# Altium PCB AQCA-Light-Module-A0.PcbDoc
Units mm, origin at the board's own origin, x right, y up, seen from the top; angles counter-clockwise.
Board outline 100 x 100 mm, 2 copper layers (Top Layer, Bottom Layer); 21 components, 26 nets, 74 pads, 175 vias.
Unrouted connection lines stored in the file: 1.
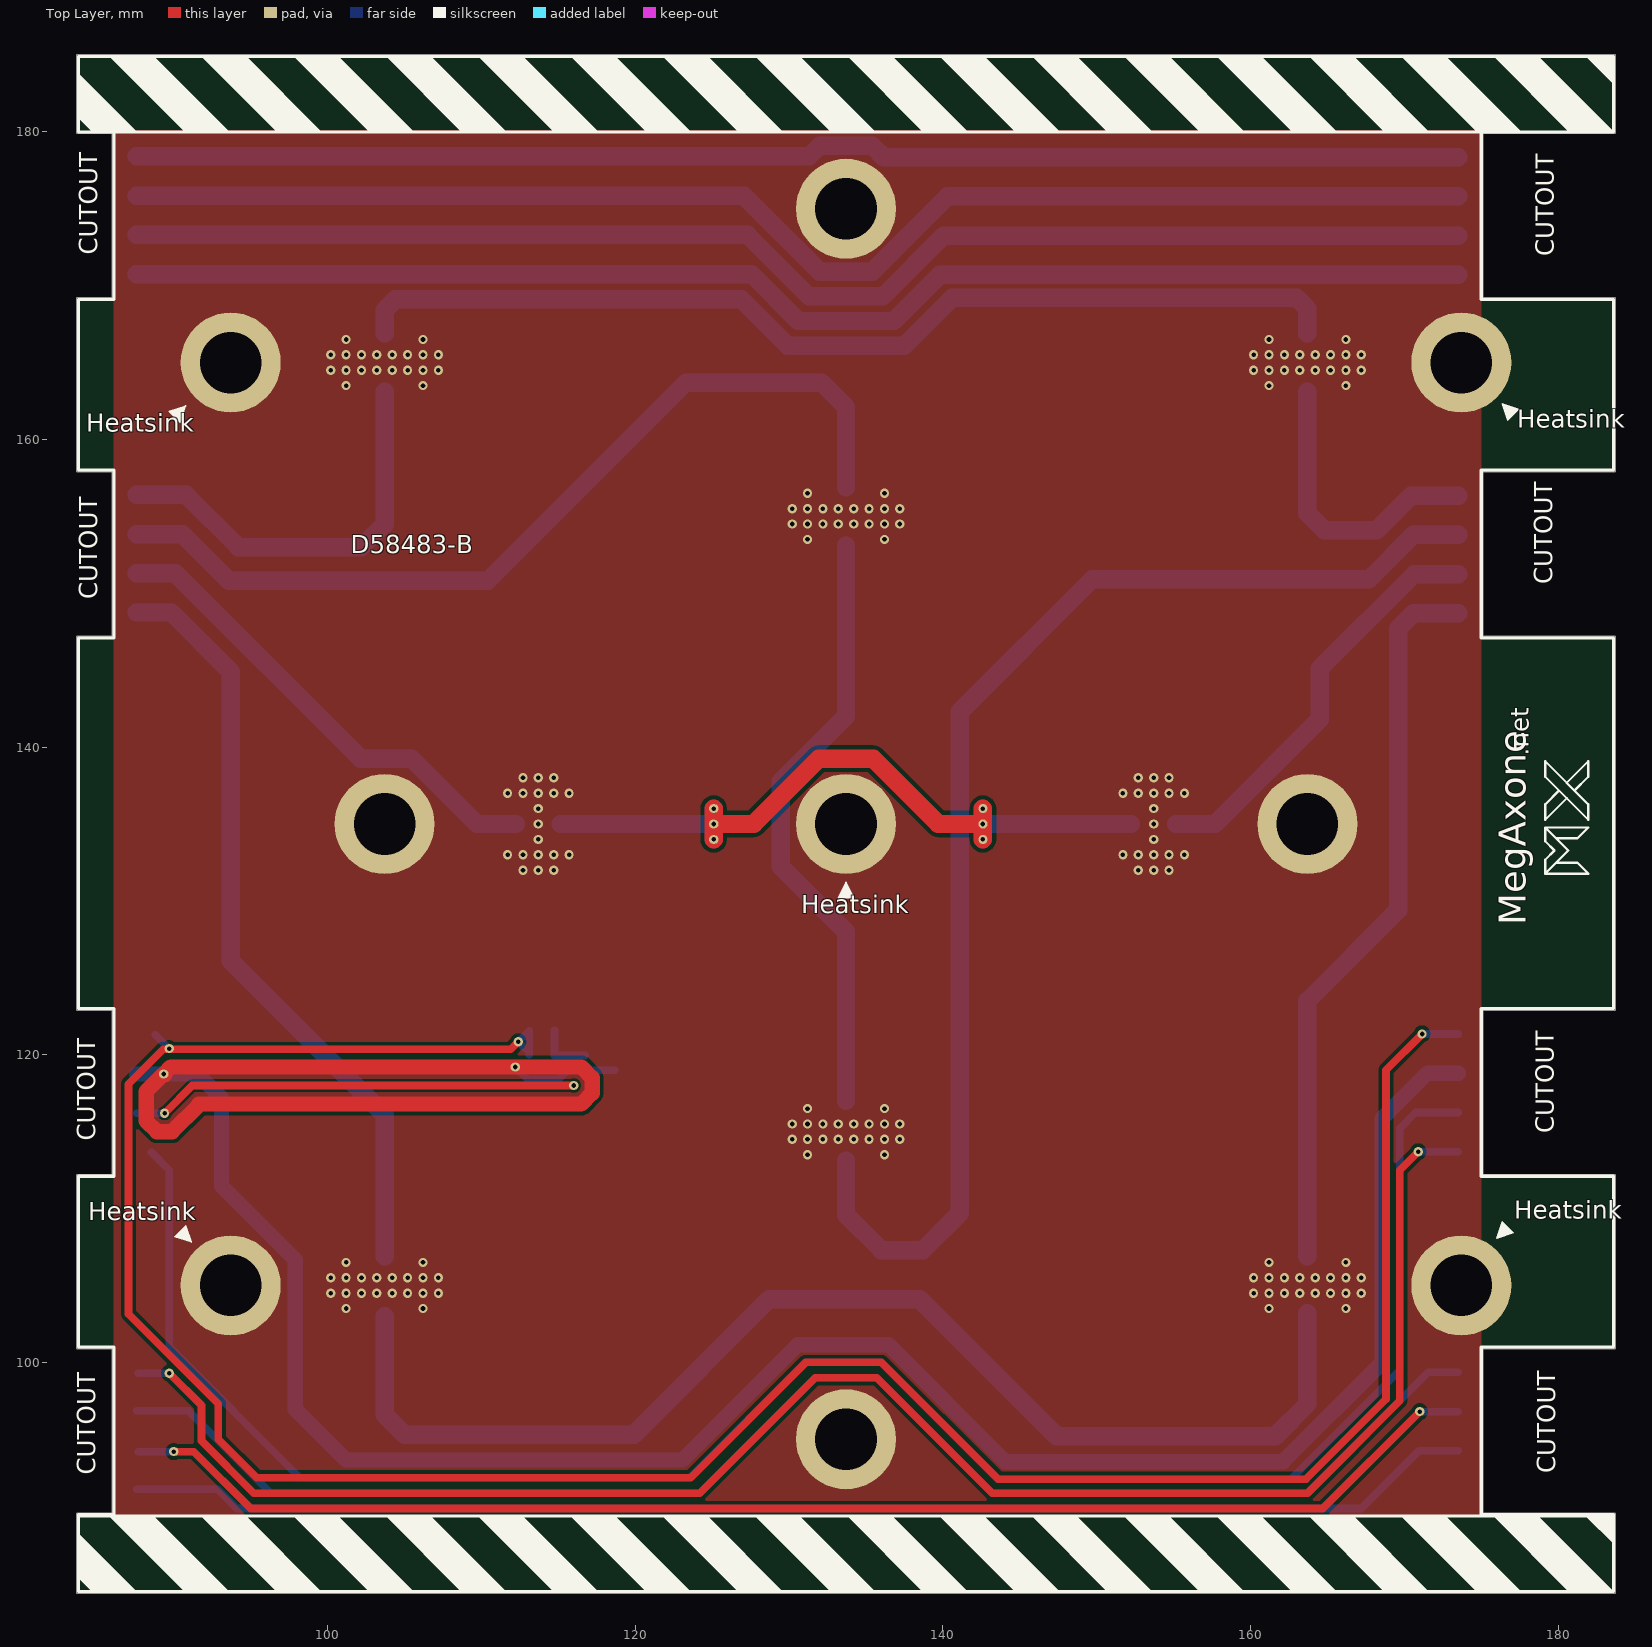
[diagram p0: Top Layer view]
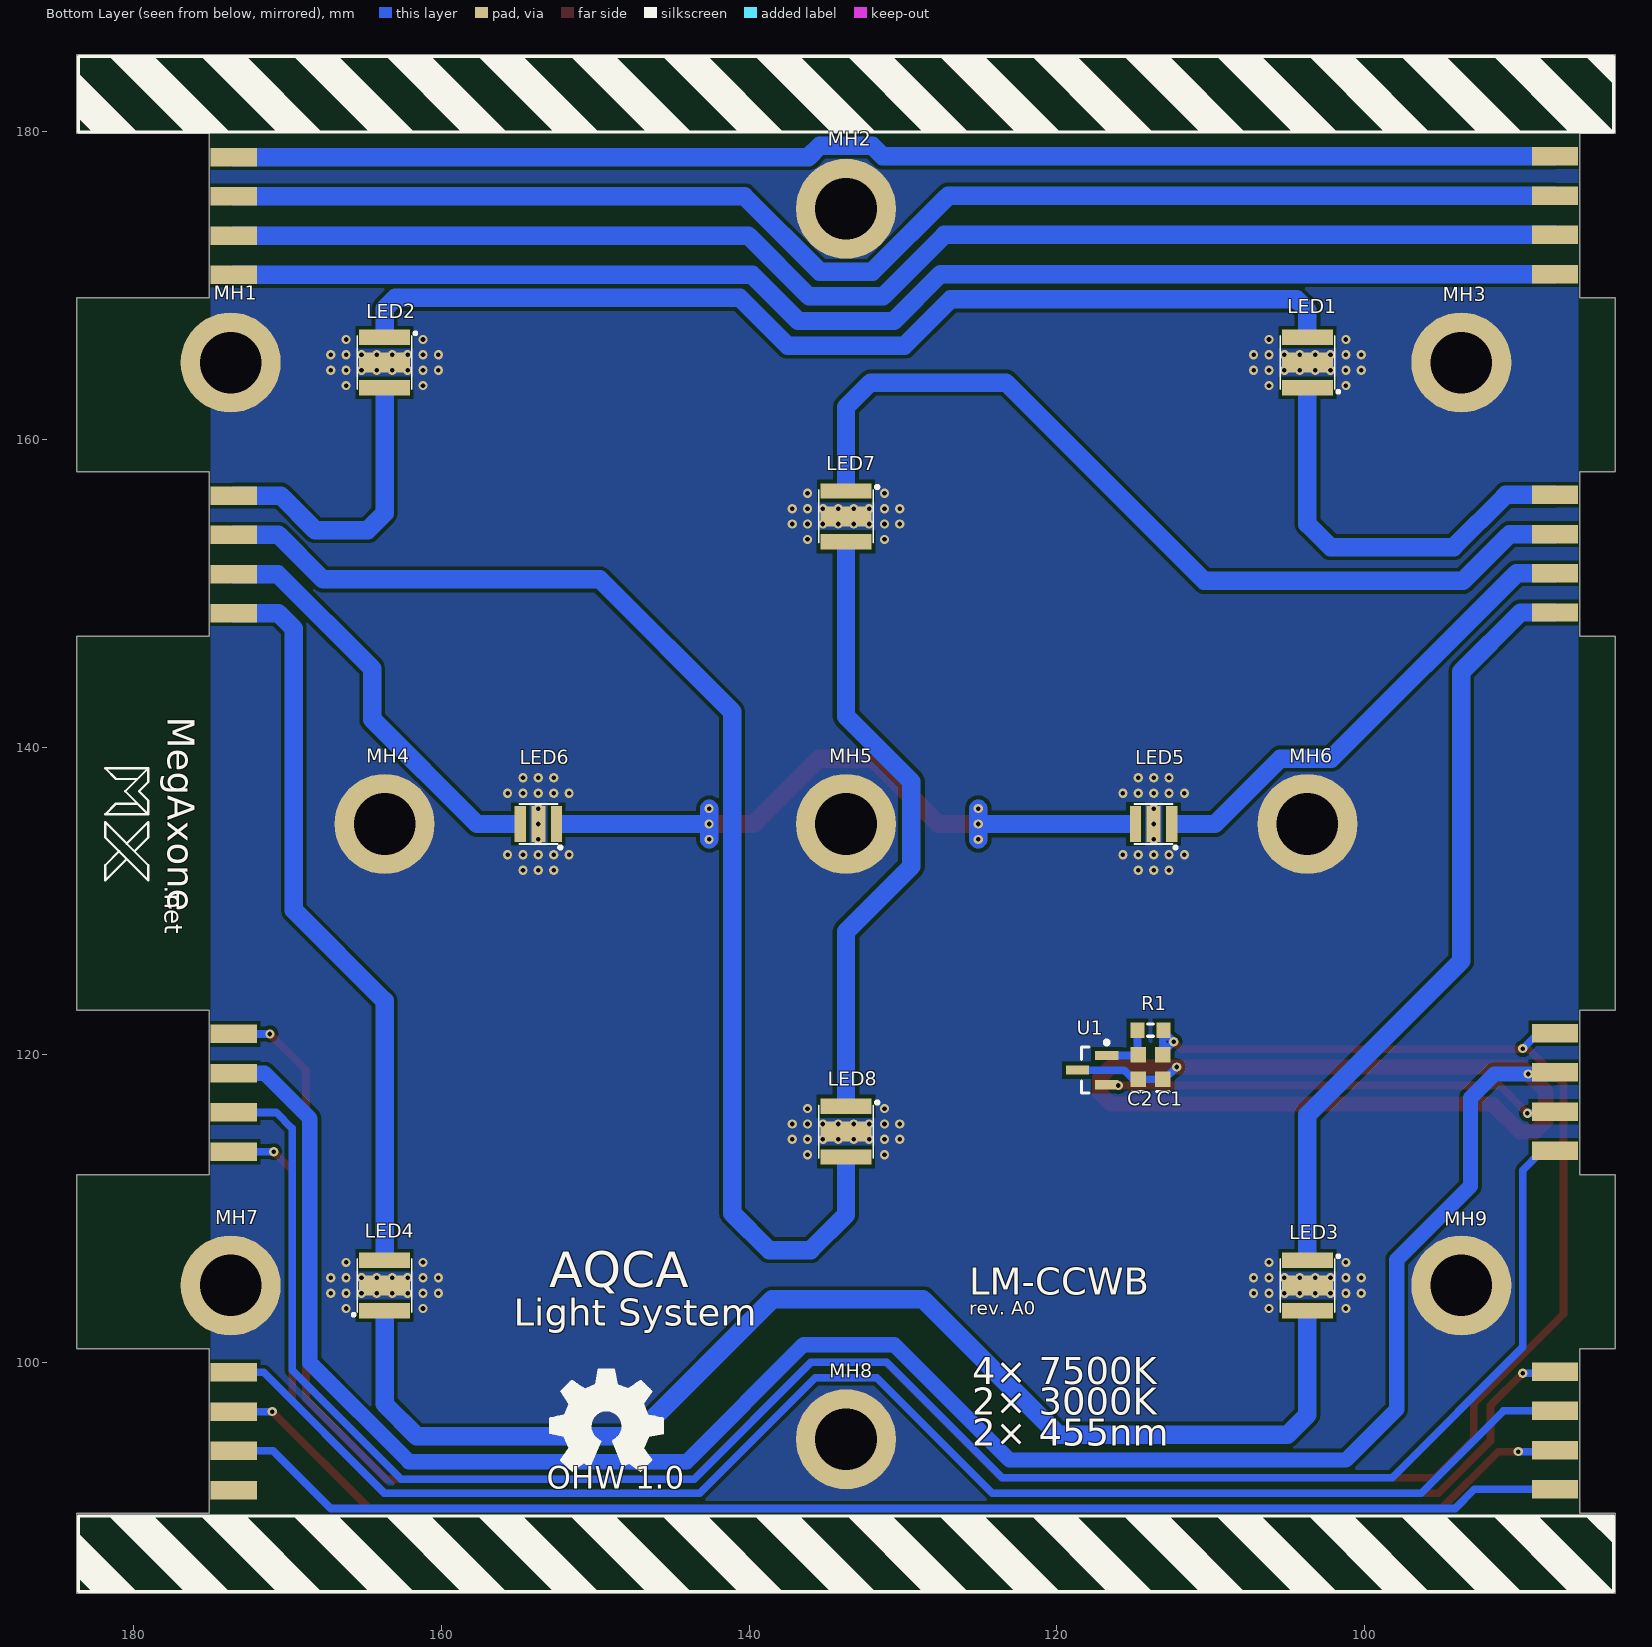
[diagram p1: Bottom Layer view, seen from below]

## Layer stack, top to bottom
Top Layer: signal copper 0.0356
Dielectric: dielectric 0.32, FR-4, Dk 4.8
Bottom Layer: signal copper 0.0356

## Board outline
83.7,85 83.7,90.2 86,90.2 86,100.9 83.7,100.9 83.7,112.2 86,112.2 86,122.9 83.7,122.9 83.7,147.2 86,147.2 86,157.9 83.7,157.9 83.7,169.2 86,169.2 86,179.9 83.7,179.9 83.7,185 183.7,185 183.7,179.9 175.1,179.9 175.1,169.2 183.7,169.2 183.7,157.9 175.1,157.9 175.1,147.2 183.7,147.2 183.7,122.9 175.1,122.9 175.1,112.2 183.7,112.2 183.7,100.9 175.1,100.9 175.1,90.2 183.7,90.2 183.7,85

## Design rules (kind name [scope] priority, off if disabled: settings)
Clearance Clearance_Heatsink [InNet('Heatsink')] p1: gap=0.25
Clearance [All] p2: gap=0.152
HoleSize [All] p1: absolutevalues=TRUE maxlimit=6.35 minlimit=0.3 maxpercent=80.000 minpercent=20.000
MinimumSolderMaskSliver [All] p1: minsoldermaskwidth=0.152
PlaneConnect [All] p1: planeconnectstyle=Direct reliefexpansion=0.508 reliefentries=4 reliefconductorwidth=0.254 reliefairgap=0.254
PolygonConnect [All] p1: connectstyle=Direct reliefconductorwidth=0.254 reliefentries=4 polygonreliefangle="90 Angle"
RoutingVias [All] p1: holewidth=0.3 width=0.6 viastyle="Through Hole" minholewidth=0.3 minwidth=0.6 maxholewidth=6.35 maxwidth=6.5
SilkToSilkClearance [All] p1: silktosilkclearance=0.152
SilkscreenOverComponentPads [All] p1: minsilkscreentomaskgap=0.254
SolderMaskExpansion [All] p1: expansion=0.05
Width [All] p1: maxlimit=12.7 minlimit=0.152 preferedwidth=0.254
23 further rules are at their usual default settings.

## Components (designator, comment, footprint, x,y, rotation, side; value= is the part's Value field where it differs from the comment)
C1 "1µF" CAPC1608N 113.1,119.2 r90 bottom
C2 "100nF" CAPC1608N 114.7,119.2 r90 bottom
LED1 "7500K" "LED XP-E" 103.7,165 r90 bottom
LED2 "7500K" "LED XP-E" 163.7,165 r270 bottom
LED3 "7500K" "LED XP-E" 103.7,105 r270 bottom
LED4 "7500K" "LED XP-E" 163.7,105 r90 bottom
LED5 "3000K" "LED XB-D" 113.7,135 r0 bottom
LED6 "3000K" "LED XB-D" 153.7,135 r0 bottom
LED7 "458nm" "LED XT-E" 133.7,155 r270 bottom
LED8 "458nm" "LED XT-E" 133.7,115 r270 bottom
MH1 "Mounting Hole" "Mount Hole 4-6.5" 173.7,165 r180 bottom
MH2 "Mounting Hole" "Mount Hole 4-6.5" 133.7,175 r180 bottom
MH3 "Mounting Hole" "Mount Hole 4-6.5" 93.7,165 r180 bottom
MH4 "Mounting Hole" "Mount Hole 4-6.5" 163.7,135 r180 bottom
MH5 "Mounting Hole" "Mount Hole 4-6.5" 133.7,135 r180 bottom
MH6 "Mounting Hole" "Mount Hole 4-6.5" 103.7,135 r180 bottom
MH7 "Mounting Hole" "Mount Hole 4-6.5" 173.7,105 r180 bottom
MH8 "Mounting Hole" "Mount Hole 4-6.5" 133.7,95 r180 bottom
MH9 "Mounting Hole" "Mount Hole 4-6.5" 93.7,105 r180 bottom
R1 "150" RESC1608N 113.9,121.6 r0 bottom
U1 "MCP9700" SOT23-3N 117.7,119 r0 bottom

## Footprints (in the part's own frame and the unit in brackets; to place one, negate y for a bottom-side part, rotate by r counter-clockwise, add the part's x,y. Pads: shape width x height; smd on the part's side, far side on the other; paste and mask are expansions set on the pad)
CAPC1608N [mm] "Chip Capacitor, Body 1.6x0.8mm, IPC Medium Density"
  rect 1x1 smd: 1(-0.8,0) 2(0.8,0)
  silkscreen extent -1.6,-0.4 -1.6,0.4, body extent -0.87,-0.48 0.87,0.48, height 0.85
"LED XB-D" [mm] "Cree LED XB-D Family 2.45×2.45mm body"
  rect 0.72x2.34 smd: A(-1.175,0) K(1.175,0)
  rect 0.92x2.34 smd: ""(0,0)
  silkscreen extent -1.5,-1.3 1.25,1.6, body extent -1.25,-1.3 1.25,1.3, height 1.85
"LED XP-E" [mm] "Cree Xlamp LED XP-E family 3.45×3.45mm body"
  rect 1x3.3 smd: A(-1.65,0) K(1.65,0)
  rect 1.3x3.3 smd: ""(0,0)
  silkscreen extent -1.96,-2.06 1.73,1.78, body extent -1.73,-1.78 1.73,1.78, height 2.3
"LED XT-E" [mm] "Cree LED XT-E family 3.45×3.45mm body"
  rect 1x3.3 smd: A(-1.65,0) K(1.65,0)
  rect 1.3x3.3 smd: ""(0,0)
  silkscreen extent -1.97,-1.78 1.72,2.1, body extent -1.73,-1.78 1.72,1.78, height 2.71
"Mount Hole 4-6.5" [mm] "Mounting Hole 4mm hole 6.5mm ring"
  round 6.5 hole 4: 1(0,0)
RESC1608N [mm] "Chip Resistor, Body 1.6x0.8mm, IPC Medium Density"
  rect 0.9x1 smd: 1(-0.85,0) 2(0.85,0)
  silkscreen extent -0.2,-0.4 0.2,0.4, body extent -0.85,-0.48 0.85,0.48, height 0.6
SOT23-3N [mm] "SOT23, 3-Leads, Body 2.9x1.3mm, Pitch 0.95mm, Lead Span 2.5mm, IPC Medium Density"
  rect 1.5x0.6 smd: 1(-0.95,-0.95) 2(-0.95,0.95) 3(0.95,0)
  silkscreen extent -1.07,-1.92 0.7,1.5, body extent -0.7,-1.5 0.7,1.5, height 1.1

## Part data
C1 C2: library part Capacitor
LED1 LED2 LED3 LED4 LED5 LED6 LED7 LED8: library part LED
R1: library part Resistor

## Free pads (board coordinates)
  rect 3x1.2 smd far side: 1(87.6,91.75) 1(87.6,113.75) 1(87.6,148.75) 1(87.6,170.75) 1(173.5,99.35) 1(173.5,121.35) 1(173.5,156.35) 1(173.5,178.35) 2(87.6,94.3) 2(87.6,116.3) 2(87.6,151.3) 2(87.6,173.3) 2(173.5,96.8) 2(173.5,118.8) 2(173.5,153.8) 2(173.5,175.8) 3(87.6,96.85) 3(87.6,118.85) 3(87.6,153.85) 3(87.6,175.85) 3(173.5,94.25) 3(173.5,116.25) 3(173.5,151.25) 3(173.5,173.25) 4(87.6,99.4) 4(87.6,121.4) 4(87.6,156.4) 4(87.6,178.4) 4(173.5,91.7) 4(173.5,113.7) 4(173.5,148.7) 4(173.5,170.7)

## Via types
v1: diameter 0.6, hole 0.3, Top Layer to Bottom Layer, tented both sides, 121 vias
v2: diameter 0.6, hole 0.3, Top Layer to Bottom Layer, 52 vias
v3: diameter 0.6, hole 0.3, Top Layer to Bottom Layer, tented top, 2 vias

## Nets (pads, with @x,y where several pads share a name; then routed paths per layer and width w, separated by ;. In a path a pad name is that pad's centre, name@x,y a point inside that pad or via, vN(x,y) a via of type N, cw(c..) or ccw(c..) an arc to the next point about the centre after c; other vN are vias at no path point)
GND: C1.1 C2.1 pad.2@173.5,118.8 pad.3@87.6,118.85 U1.3 | length 201.6
  Top Layer w1: v1(89.35,118.75) 89.8,119.2 v1(112.2,119.2) 116.497,119.2 117.2,118.497 117.2,117.503 116.497,116.8 91.626,116.8 91.626,116.729 89.897,115 88.903,115 88.2,115.703 88.2,117.6 89.3,118.7 v1@89.4,118.7
  Bottom Layer w0.5: v1(112.2,119.2) 113,118.4 C1.1 C2.1 115.019,118.4 115.619,119 U1.3
  Bottom Layer w1: pad.3@87.6,118.75 v1(89.35,118.75) 91.55,118.75 93.1,117.2 93.1,111.469 97.9,106.669 97.9,96.95 101.2,93.65 123.074,93.65 130.574,101.15 136.449,101.15 144.049,93.55 162.124,93.55 168.55,99.976 168.55,115.85 171.5,118.8 pad.2@173.5,118.8
Heatsink: LED1. LED2. LED3. LED4. LED5. LED6. LED7. LED8. MH1.1 MH2.1 MH3.1 MH4.1 MH5.1 MH6.1 MH7.1 MH8.1 MH9.1
  other v1: 101.2,103.5 106.2,103.5 161.2,103.5 166.2,103.5 100.2,104.5 101.2,104.5 106.2,104.5 107.2,104.5 160.2,104.5 161.2,104.5 166.2,104.5 167.2,104.5 100.2,105.5 101.2,105.5 106.2,105.5 107.2,105.5 160.2,105.5 161.2,105.5 166.2,105.5 167.2,105.5 101.2,106.5 106.2,106.5 161.2,106.5 166.2,106.5 131.2,113.5 136.2,113.5 130.2,114.5 131.2,114.5 136.2,114.5 137.2,114.5 130.2,115.5 131.2,115.5 136.2,115.5 137.2,115.5 131.2,116.5 136.2,116.5 112.7,132 113.7,132 114.7,132 152.7,132 153.7,132 154.7,132 111.7,133 112.7,133 113.7,133 114.7,133 115.7,133 151.7,133 152.7,133 153.7,133 154.7,133 155.7,133 111.7,137 112.7,137 113.7,137 114.7,137 115.7,137 151.7,137 152.7,137 153.7,137 154.7,137 155.7,137 112.7,138 113.7,138 114.7,138 152.7,138 153.7,138 154.7,138 131.2,153.5 136.2,153.5 130.2,154.5 131.2,154.5 136.2,154.5 137.2,154.5 130.2,155.5 131.2,155.5 136.2,155.5 137.2,155.5 131.2,156.5 136.2,156.5 101.2,163.5 106.2,163.5 161.2,163.5 166.2,163.5 100.2,164.5 101.2,164.5 106.2,164.5 107.2,164.5 160.2,164.5 161.2,164.5 166.2,164.5 167.2,164.5 100.2,165.5 101.2,165.5 106.2,165.5 107.2,165.5 160.2,165.5 161.2,165.5 166.2,165.5 167.2,165.5 101.2,166.5 106.2,166.5 161.2,166.5 166.2,166.5
  other v2: 102.2,104.5 103.2,104.5 104.2,104.5 105.2,104.5 162.2,104.5 163.2,104.5 164.2,104.5 165.2,104.5 102.2,105.5 103.2,105.5 104.2,105.5 105.2,105.5 162.2,105.5 163.2,105.5 164.2,105.5 165.2,105.5 132.2,114.5 133.2,114.5 134.2,114.5 135.2,114.5 132.2,115.5 133.2,115.5 134.2,115.5 135.2,115.5 153.7,134 153.7,135 113.7,136 153.7,136 132.2,154.5 133.2,154.5 134.2,154.5 135.2,154.5 132.2,155.5 133.2,155.5 134.2,155.5 135.2,155.5 102.2,164.5 103.2,164.5 104.2,164.5 105.2,164.5 162.2,164.5 163.2,164.5 164.2,164.5 165.2,164.5 102.2,165.5 103.2,165.5 104.2,165.5 105.2,165.5 162.2,165.5 163.2,165.5 164.2,165.5 165.2,165.5
  other v3: 113.7,134 113.7,135
NetC2_2: C2.2 R1.2 U1.1 | length 3.6
  Bottom Layer w0.5: R1.2 114.75,119.95 U1.1
NetLED1_A: LED1.A pad.4@87.6,156.4 | length 26.7
  Bottom Layer w1: 90.8,156.4 90.9,156.3
  Bottom Layer w1.2: pad.4@87.6,156.4 90.8,156.4 ; 90.9,156.3 94.2,153 102.2,153 103.7,154.5 LED1.A@103.7,163.1
NetLED1_K: LED1.K LED2.A | length 66.2
  Bottom Layer w1.2: LED1.K@103.7,166.9 103.7,168.398 104.402,169.1 126.9,169.1 129.9,166.1 137.5,166.1 140.6,169.2 163,169.2 163.7,168.5 LED2.A@163.7,166.9
NetLED2_K: LED2.K pad.1@173.5,156.35 | length 19.1
  Bottom Layer w1.2: LED2.K@163.7,163.1 163.7,155.2 164.8,154.1 168.2,154.1 170.45,156.35 pad.1@173.5,156.35
NetLED3_A: LED3.A pad.1@87.6,148.75 | length 49.8
  Bottom Layer w1.2: pad.1@87.6,148.75 89.85,148.75 93.7,144.9 93.7,126.1 103.7,116.1 LED3.A@103.7,106.9
NetLED3_K: LED3.K LED4.A | length 81
  Bottom Layer w1.2: LED3.K@103.7,103 103.7,96.6 105,95.3 119.9,95.3 128.7,104.1 138.5,104.1 147.4,95.2 161.6,95.2 163.7,97.3 LED4.A@163.7,103.2
NetLED4_K: LED4.K pad.4@173.5,148.7 | length 47.6
  Bottom Layer w1.2: LED4.K@163.7,106.9 163.7,123.5 169.6,129.4 169.6,147.7 170.6,148.7 pad.4@173.5,148.7
NetLED5_A: LED5.A pad.2@87.6,151.3 | length 31.4
  Bottom Layer w1.2: pad.2@87.6,151.3 90.1,151.3 102.15,139.25 105.46,139.25 109.71,135 LED5.A@112.24,135
NetLED5_K: LED5.K LED6.A | length 48.6
  Top Layer w1.2: v1(125.1,134) v1(125.1,135) ; v1(125.1,136) v1(125.1,135) ; v1(142.6,134) v1(142.6,135) ; v1(142.6,136) v1(142.6,135) ; v1(125.1,135) 127.69,135 131.94,139.25 135.46,139.25 139.71,135 v1(142.6,135)
  Bottom Layer w1.2: LED5.K@115.16,135 v1(125.1,135) ; v1(125.1,134) v1(125.1,135) ; v1(125.1,136) v1(125.1,135) ; v1(142.6,134) v1(142.6,135) ; v1(142.6,136) v1(142.6,135) ; LED6.A@152.2,135 v1(142.6,135)
NetLED6_K: LED6.K pad.3@173.5,151.25 | length 27
  Bottom Layer w1.2: LED6.K@155.16,135 157.69,135 164.5,141.81 164.5,145.1 170.65,151.25 pad.3@173.5,151.25
NetLED7_A: LED7.A pad.3@87.6,153.85 | length 58.6
  Bottom Layer w1: 90.55,153.85 90.65,153.75
  Bottom Layer w1.2: pad.3@87.6,153.85 90.55,153.85 ; 90.65,153.75 93.6,150.8 110.4,150.8 123.3,163.7 132.1,163.7 133.7,162.1 LED7.A@133.7,156.9
NetLED7_K: LED7.K LED8.A | length 39.6
  Bottom Layer w1.2: LED8.A@133.7,117 133.7,128 129.45,132.25 129.45,137.75 133.7,142 LED7.K@133.7,153.1
NetLED8_K: LED8.K pad.2@173.5,153.8 | length 82.6
  Bottom Layer w1.2: LED8.K@133.7,113.1 133.7,109.6 136,107.3 138.7,107.3 141.1,109.7 141.1,142.3 149.7,150.9 167.7,150.9 170.6,153.8 pad.2@173.5,153.8
NetLEDKin_1: pad.1@87.6,170.75 pad.4@173.5,170.7 | length 88.4
  Bottom Layer w1.2: pad.1@87.6,170.75 127.55,170.75 130.6,167.7 136.8,167.7 139.8,170.7 pad.4@173.5,170.7
NetLEDKin_2: pad.2@87.6,173.3 pad.3@173.5,173.25 | length 89.2
  Bottom Layer w1.2: pad.2@87.6,173.3 127.3,173.3 131.3,169.3 136.1,169.3 140.05,173.25 pad.3@173.5,173.25
NetLEDKin_3: pad.2@173.5,175.8 pad.3@87.6,175.85 | length 89.8
  Bottom Layer w1.2: pad.3@87.6,175.85 127.052,175.85 ; 127.152,175.75 132.002,170.9 135.398,170.9 140.298,175.8 pad.2@173.5,175.8
NetLEDKin_4: pad.1@173.5,178.35 pad.4@87.6,178.4 | length 86.5
  Bottom Layer w1.2: pad.4@87.6,178.4 131.302,178.4 132.002,179.1 135.398,179.1 136.148,178.35 pad.1@173.5,178.35
NetSENSEin_1: pad.1@87.6,113.75 pad.3@173.5,116.25 | length 125.8
  Bottom Layer w0.5: pad.1@88.55,113.65 89.7,112.5 89.7,101 98.2,92.5 123.55,92.5 131.05,100 135.973,100 143.573,92.4 162.6,92.4 169.7,99.5 169.7,115.2 170.75,116.25 pad.3@173.5,116.25
NetSENSEin_2: pad.2@87.6,116.3 U1.2 | length 29.1
  Top Layer w0.5: v1(89.4,116.2) 91.2,118 v1(116,118)
  Bottom Layer w0.5: pad.2@87.6,116.2 v1(89.4,116.2)
NetSENSEout_4: pad.4@87.6,99.4 pad.4@173.5,113.7 | length 114.6
  Top Layer w0.5: v1(89.7,99.3) 91.8,97.2 91.8,94.9 95.2,91.5 124.2,91.5 131.7,99 135.7,99 143.2,91.5 163.7,91.5 169.7,97.5 169.7,112.5 v1(170.9,113.7)
  Bottom Layer w0.5: pad.4@87.7,99.3 v1(89.7,99.3) ; v1(170.9,113.7) pad.4@173.5,113.7
NetTempin_1: pad.1@87.6,91.75 pad.3@173.5,94.25 | length 88
  Bottom Layer w0.5: pad.1@87.6,91.75 92.85,91.75 94.1,90.5 167.2,90.5 170.95,94.25 pad.3@173.5,94.25
NetTempin_2: pad.2@87.6,94.3 pad.2@173.5,96.8 | length 89.9
  Top Layer w0.5: v1(90,94.2) 91.3,94.2 95,90.5 164.7,90.5 v1(171,96.8)
  Bottom Layer w0.5: pad.2@87.7,94.2 v1(90,94.2) ; v1(171,96.8) pad.2@173.5,96.8
NetTempin_3: pad.1@173.5,99.35 pad.3@87.6,96.85 | length 97.6
  Bottom Layer w0.5: pad.3@87.6,96.85 90.95,96.85 96.3,91.5 124.2,91.5 131.7,99 135.7,99 143.2,91.5 163.7,91.5 171.55,99.35 pad.1@173.5,99.35
V5: C1.2 pad.1@173.5,121.35 pad.4@87.6,121.4 R1.1 | length 169.3
  Top Layer w0.5: v1(112.4,120.85) 111.9,120.35 89.75,120.35 v1(89.7,120.4) 89.65,120.35 89.324,120.35 87.05,118.076 87.05,103.15 92.9,97.3 92.9,95 95.4,92.5 123.6,92.5 131.1,100 136,100 143.6,92.4 163.6,92.4 168.8,97.6 168.8,119 v1(171.15,121.35)
  Bottom Layer w0.5: pad.4@88.8,121.3 v1(89.7,120.4) ; C1.2 C1.2@113.1,120.15 ; v1(171.15,121.35) pad.1@173.5,121.35 ; C1.2@113.1,120.15 v1(112.4,120.85) 113.1,121.55 C1.2@113.1,120.15

## Polygon pours and split planes (outlines as drawn)
GND on Top Layer "Top Layer-No Net" (solid, remove dead copper, pour order 31): 89.8,119.2 89.8,119.1 88.2,117.5 88.2,115.703 88.903,115 90.1,115 90.1,115.274 91.626,116.8 116.497,116.8 116.497,117.097 117.2,117.8 117.2,118.497 117.2,118.5 116.3,119.4 116.1,119.2 89.8,119.2
Heatsink on Top Layer "Top Layer-No Net" (solid, remove dead copper, pour order 22): 174.99,180.09 86.09,180.09 86.09,90.09 174.99,90.09
Heatsink on Bottom Layer "Top Layer-No Net" (solid, remove dead copper, pour order 29): 175,180.1 175,90.1 86.1,90.1 86.1,180.1

## Silkscreen, mask and mechanical layers (free items; w line width, h text height)
Top Overlay:
  drawing of 128 lines, arcs and shapes, not listed
  text "CUTOUT" at 85.4,172 h2 r90
  text "CUTOUT" at 180.1,171.9 h2 r90
  text "Heatsink" at 177.327,160.361 h2
  text "Heatsink" at 84.3,160.1 h2
  text "D58483-B" at 101.5,152.2 h2
  text "CUTOUT" at 180,150.6 h2 r90
  text "CUTOUT" at 85.4,149.6 h2 r90
  text ".net" at 178.488,139.427 h2 r90
  text "Heatsink" at 130.8,128.8 h2
  text "MegAxone" at 178.488,128.427 h3 r90
  text "CUTOUT" at 180.1,114.9 h2 r90
  text "CUTOUT" at 85.3,114.4 h2 r90
  text "Heatsink" at 177.127,108.961 h2
  text "Heatsink" at 84.427,108.861 h2
  text "CUTOUT" at 180.2,92.8 h2 r90
  text "CUTOUT" at 85.3,92.7 h2 r90
Bottom Overlay:
  drawing of 571 lines, arcs and shapes, not listed
  text "MegAxone" at 178.388,141.973 h3 r90
  text ".net" at 178.388,130.973 h2 r90
  text "AQCA" at 153,104.1 h4
  text "LM-CCWB" at 125.7,103.8 h3
  text "rev. A0" at 125.7,102.8 h1.5
  text "Light System" at 155.3,101.8 h3
  text "4× 7500K" at 125.5,98 h3
  text "2× 3000K" at 125.5,96 h3
  text "2× 455nm" at 125.5,94 h3
  text "OHW 1.0" at 153.157,91.3 h2.5
Top Solder:
  region: 103.7,125 103.7,145 123.7,145 123.7,125
  region: 123.7,105 123.7,125 143.7,125 143.7,105
  region: 123.7,145 123.7,165 143.7,165 143.7,145
  region: 93.7,95 93.7,115 113.7,115 113.7,95
  region: 93.7,155 93.7,175 113.7,175 113.7,155
  region: 153.7,115 168.1,115 168.1,98.9 162.3,93.1 153.7,93.1
  region: 153.7,155 153.7,175 173.7,175 173.7,155
  region: 143.7,125 143.7,145 163.7,145 163.7,125